# Altium PCB PCB1.PcbDoc
Units mm, origin at the board's own origin, x right, y up, seen from the top; angles counter-clockwise.
Board outline 65.15 x 49.91 mm, 2 copper layers (Top Layer, Bottom Layer); 20 components, 14 nets, 53 pads, 0 vias.
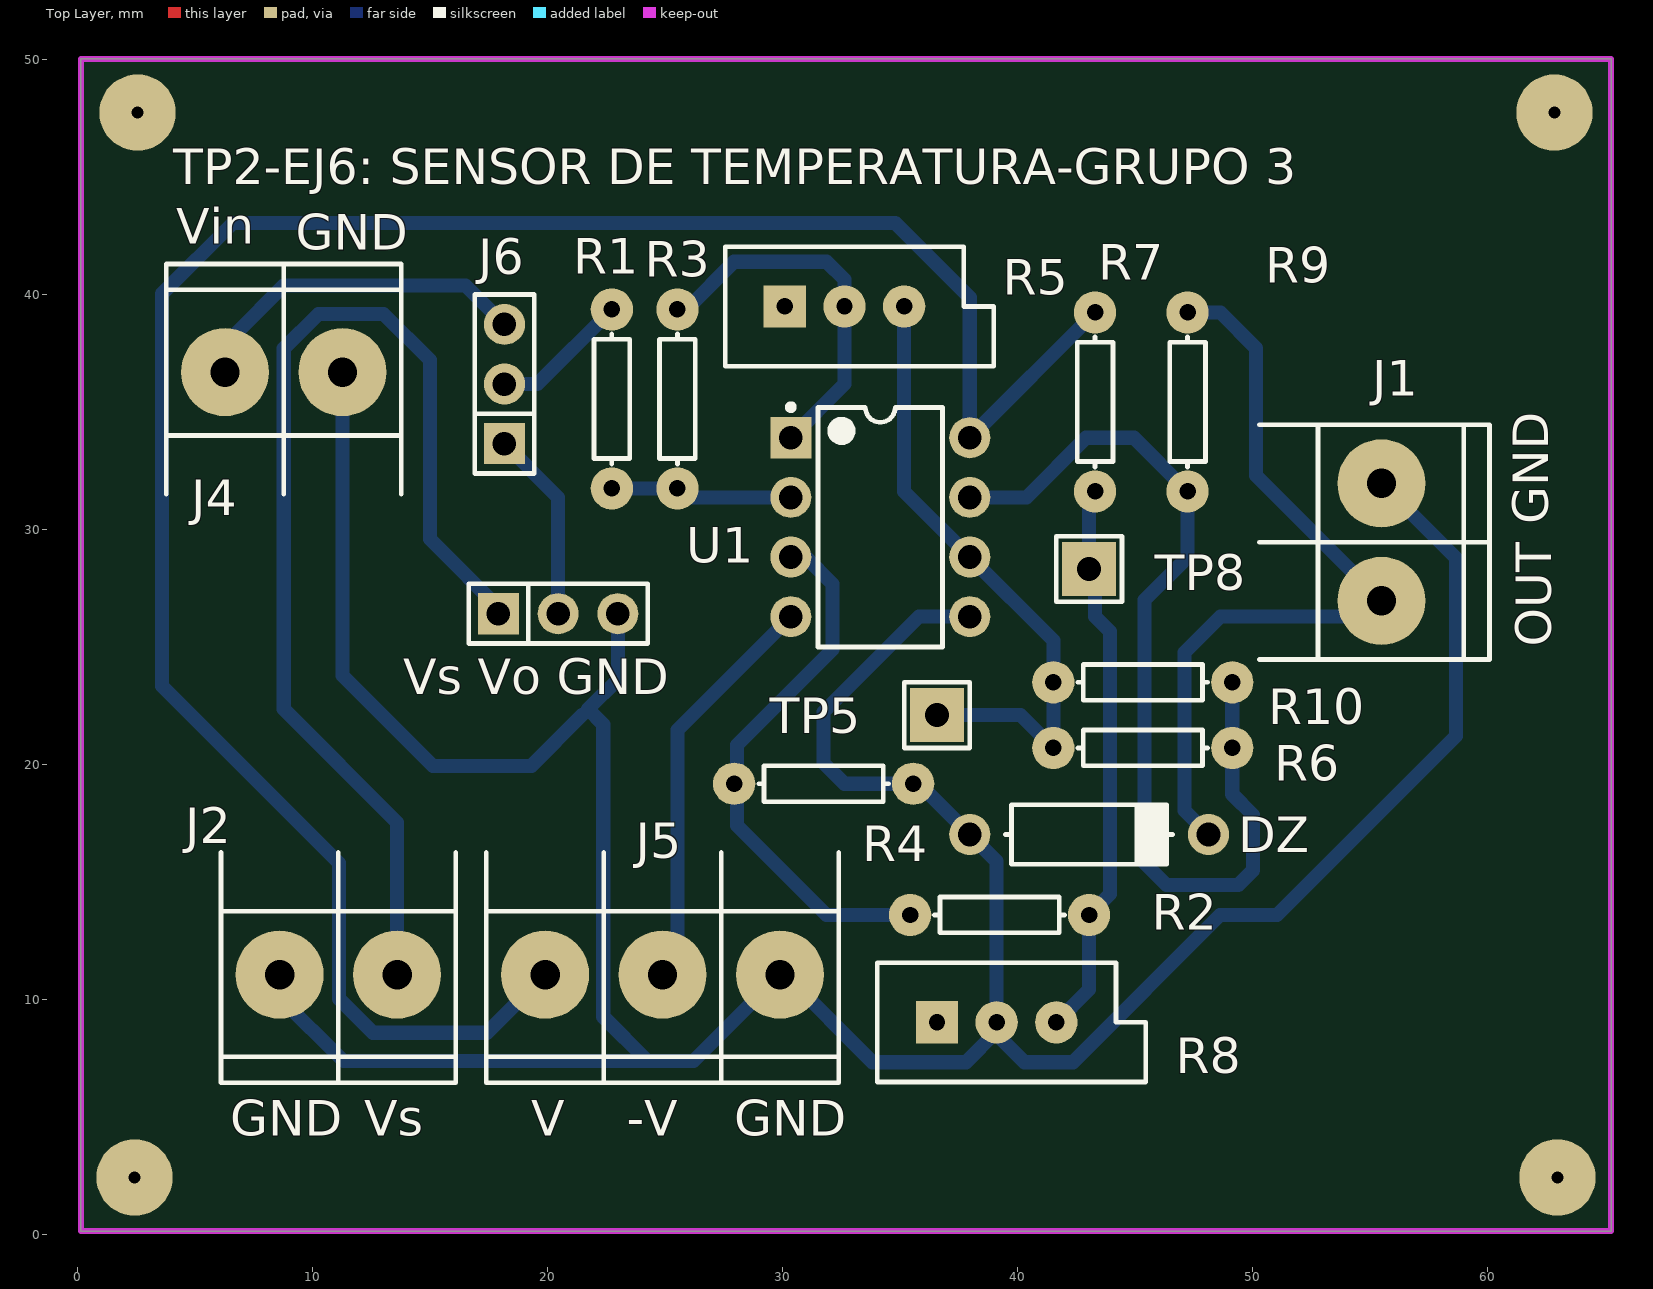
[diagram p0: Top Layer view]
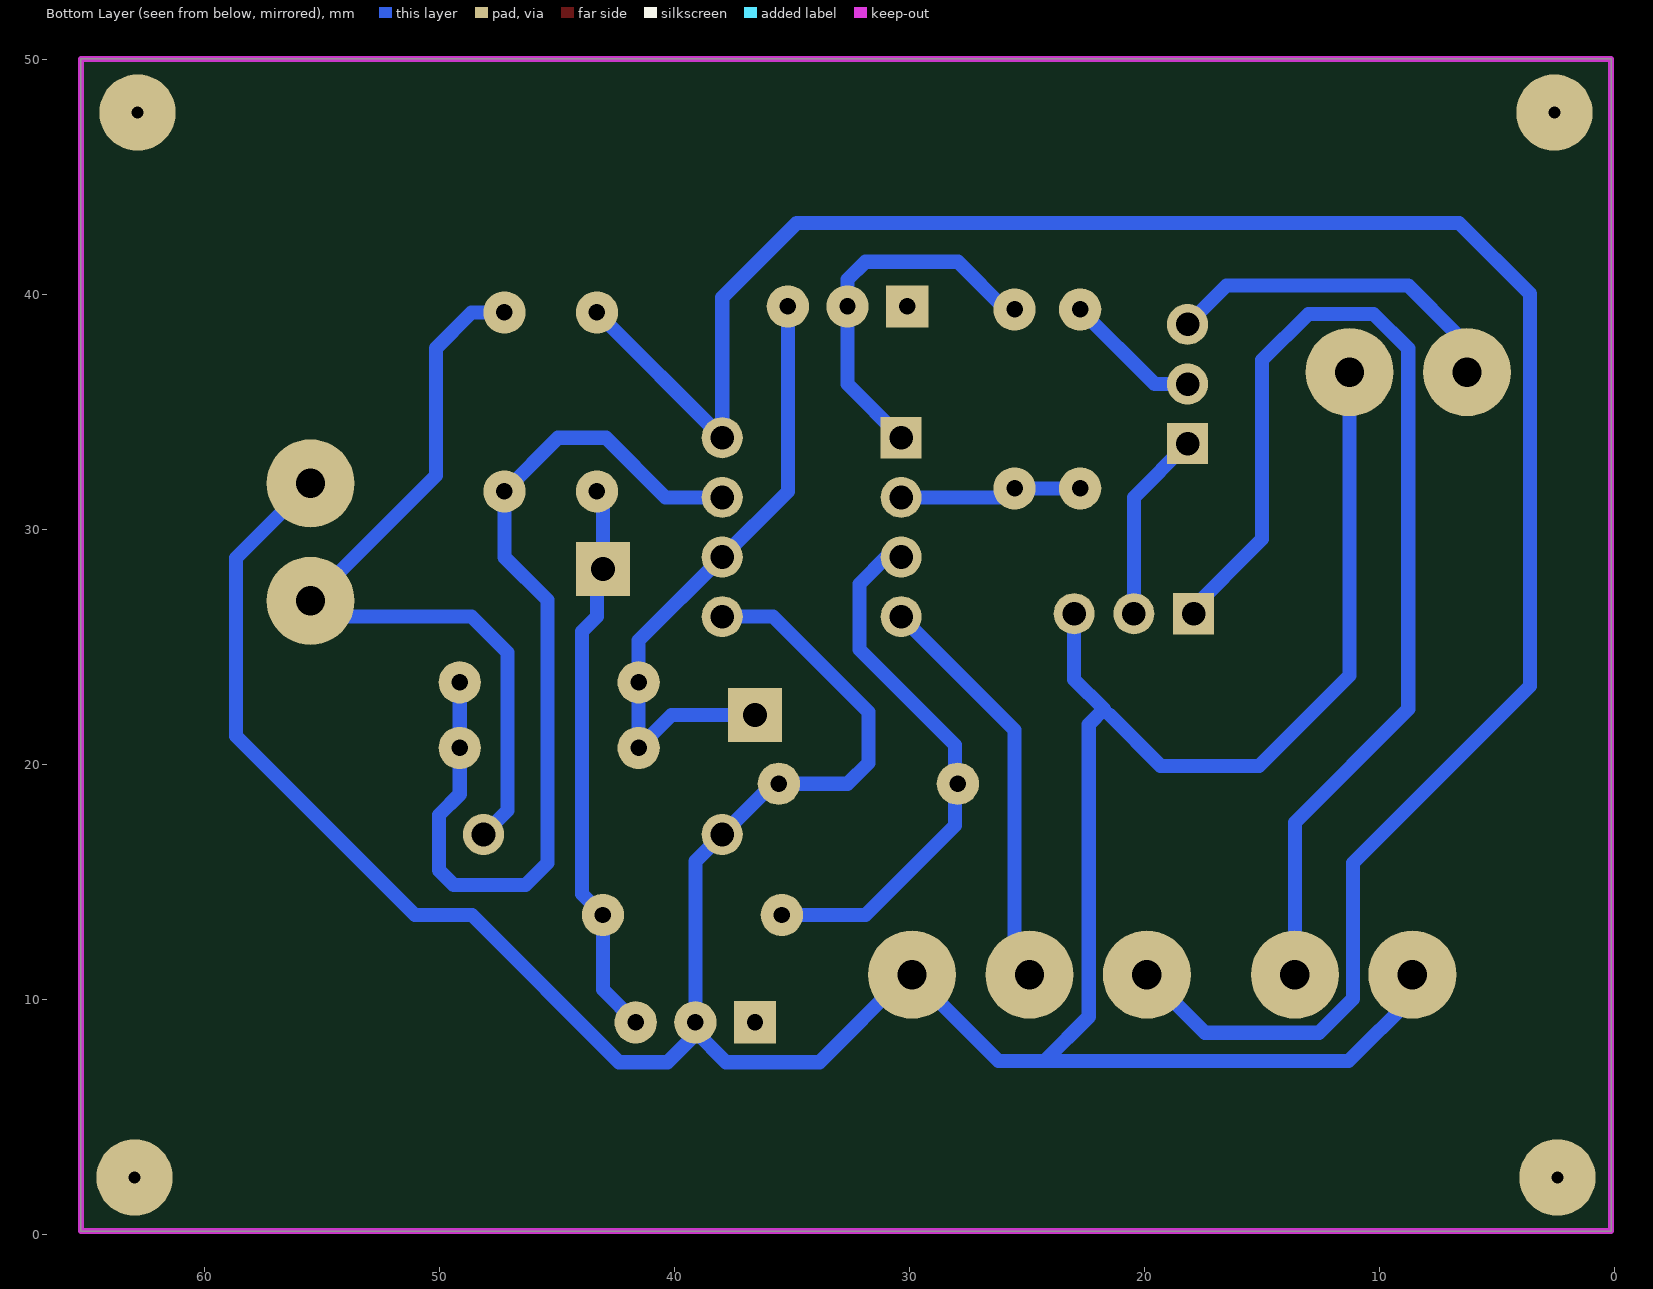
[diagram p1: Bottom Layer view, seen from below]

## Layer stack, top to bottom
Top Solder: solder mask 0.0102, Solder Resist, Dk 3.5
Top Layer: signal copper 0.0356
Dielectric 1: dielectric 0.32, FR-4, Dk 4.8
Bottom Layer: signal copper 0.0356
Bottom Solder: solder mask 0.0102, Solder Resist, Dk 3.5

## Board outline
0.127,0.127 0.127,50.038 65.278,50.038 65.278,0.127

## Design rules (kind name [scope] priority, off if disabled: settings)
Clearance [All] p1: gap=0.3 ignorepadtopadclearanceinfootprint=FALSE
PolygonConnect [All] p1: connectstyle=Relief reliefconductorwidth=0.254 reliefentries=4 polygonreliefangle="90 Angle" airgapwidth=0.254
RoutingVias [All] p1: holewidth=0.7 width=2 viastyle="Through Hole" minholewidth=0.7 minwidth=2 maxholewidth=0.7 maxwidth=2
SolderMaskExpansion [All] p1: expansion=0.102
Width [All] p1: maxlimit=0.6 minlimit=0.6 preferedwidth=0.6
30 further rules are at their usual default settings.

## Components (designator, comment, footprint, x,y, rotation, side; value= is the part's Value field where it differs from the comment)
DZ "" DO41 43.053,17.018 r0 top
J1 "" BORNERA2 55.499,29.464 r180 top
J2 "" BORNERA2 11.089,11.049 r90 top
J4 "" BORNERA2 8.763,36.703 r270 top
J5 "" BORNERA3 24.892,11.049 r90 top
J6 "JUMPER" JUMPER3 18.161,36.195 r90 top
R1 "" AXIAL-0.3 22.733,35.56 r270 top value=10K
R2 "" AXIAL-0.3 39.243,13.589 r180 top value=10K
R3 "" AXIAL-0.3 25.527,35.56 r90 top value=100K
R4 "" AXIAL-0.3 31.75,19.177 r180 top value=100K
R5 "" VR5 32.639,39.497 r0 top value=2K
R6 "" AXIAL-0.3 45.339,23.495 r180 top value=10K
R7 "" AXIAL-0.3 43.307,35.433 r90 top value=100K
R8 "" VR5 39.116,9.017 r0 top value=5K
R9 "" AXIAL-0.3 47.244,35.433 r270 top value=16K
R10 "" AXIAL-0.3 45.339,20.701 r0 top value=10K
TP5 "TP" TPTH 36.576,22.098 r0 top
TP8 "TP" TPTH 43.053,28.321 r0 top
U1 "TL072CP" TI-P8 34.163,30.099 r0 top
"Vs Vo GND" "" JUMPER3 20.447,26.416 r0 top (schematic designator VLM35)

## Footprints (in the part's own frame and the unit in brackets; to place one, negate y for a bottom-side part, rotate by r counter-clockwise, add the part's x,y. Pads: shape width x height; smd on the part's side, far side on the other; paste and mask are expansions set on the pad)
AXIAL-0.3 [mm] "Axial Device, Thru-Hole; 2 Leads; 0.3 in Pin Spacing"
  round 1.8 hole 0.7 unplated: 1(-3.81,0) 2(3.81,0)
  silkscreen extent -2.77,-0.76 2.77,0.76
BORNERA2 [mm] "Bornera con Tornillos 5mm separación"
  round 3.75 hole 1.25: 1(0,2.5) 2(0,-2.5)
  silkscreen extent -4.6,-5 5.2,5, body extent -3.76,-4.89 3.94,5.61, height 10
BORNERA3 [mm] "Bornera con Tornillos 5mm separación"
  round 3.75 hole 1.25: 1(0,5) 2(0,0) 3(0,-5)
  silkscreen extent -4.6,-7.5 5.2,7.5, body extent -3.76,-7.39 3.94,8.11, height 10.05
DO41 [mm]
  round 1.75 hole 1.016: 1(-5.08,0) 2(5.08,0)
  silkscreen extent -3.56,-1.27 3.56,1.27, body extent -5.46,-1.19 5.46,1.37, height 2.03
JUMPER3 [mm]
  rect 1.75x1.75 hole 1: 1(-2.54,0)
  round 1.75 hole 1: 2(0,0) 3(2.54,0)
  silkscreen extent -3.81,-1.27 3.81,1.27, body extent -3.81,-1.3 3.81,1.27, height 16.15
TI-P8 [mm] "DIP, 8-Leads, Body 9.59x6.35mm, Pitch 2.54mm"
  rect 1.75x1.75 hole 1.016: 1(-3.81,3.81)
  round 1.75 hole 1.016: 2(-3.81,1.27) 3(-3.81,-1.27) 4(-3.81,-3.81) 5(3.81,-3.81) 6(3.81,-1.27) 7(3.81,1.27) 8(3.81,3.81)
  silkscreen extent -3.93,-5.1 2.65,5.23, body extent -3.95,-5.07 3.95,5.07, height 5.08
TPTH [mm]
  rect 2.3x2.3 hole 1.016: 1(0,0)
  silkscreen extent -1.4,-1.4 1.4,1.4, body extent -1.27,-1.27 1.27,1.27, height 6.04
VR5 [mm] "Thru-Hole; 3 Leads"
  rect 1.8x1.8 hole 0.7 unplated: 1(-2.54,0)
  round 1.8 hole 0.7 unplated: 2(0,0) 3(2.54,0)
  silkscreen extent -5.08,-2.54 6.35,2.54

## Part data
DZ: library part "DIODO ZENER"
J1 J2 J4: library part "BORNERA 2"
J5: library part "BORNERA 3"
J6: library part JUMPER3
R1 R2 R3 R4 R6 R7 R9 R10: library part Res1, "Resistor", LatestRevisionDate=17-Jul-2002, LatestRevisionNote="Re-released for DXP Platform.", PackageDescription="Axial Device, Thru-Hole; 2 Leads; 0.3 in Pin Spacing", PackageReference=AXIAL-0.3, Published=8-Jun-2000, Publisher="Altium Limited"
R5 R8: library part RPot, "Potentiometer", LatestRevisionDate=17-Jul-2002, LatestRevisionNote="Re-released for DXP Platform.", PackageDescription="Variable Resistor, Thru-Hole; 3 Leads", PackageReference=VR5, Published=8-Jun-2000, Publisher="Altium Limited", Set Position=0.5, Sim Note="Enter the Resistance value and the set point into parameter fields."
U1: "Dual Low-Noise JFET-Input General-Purpose Operational Amplifier, 7 to 36 V, 0 to 70 degC, 8-pin DIP (P8), Pb-Free (RoHS)", Manufacturer="Texas Instruments", Rating=Catalog, Supplier Part Number 1=296-1775-5-ND, Total Supply Voltage(Max)(+5V is 5, +/-5V is 10)=36, Total Supply Voltage(Min)(+5V is 5, +/-5V is 10)=7, CMRR(Min)(dB)=70, Code_JEDEC=MS-001, ComponentLink1Description="Manufacturer URL", ComponentLink1URL=http://www.ti.com/, ComponentLink2Description=Datasheet, ComponentLink2URL=http://www.ti.com/lit/ds/symlink/tl072.pdf, ComponentLink3Description="Package Specification", ComponentLink3URL=http://www.ti.com/litv/pdf/mpdi001b, DatasheetVersion=SLOS080J, Eco-Plan="Pb-Free (RoHS)", GBW(Typ)(MHz)=3, IIB(Max)(pA)=200, Iq per channel(Max)(mA)=2.5, Mounting Technology="Through Hole", Number of Channels=2, Offset Drift(Typ)(uV/C)=18, PackageDescription="8-Pin Plastic In-Line, Body 9.59 x 6.35 mm, Pitch 2.54 mm", PackageReference=P8, PackageVersion="4040082/E, 04/2010", PartNumber=TL072CP, Slew Rate(Typ)(V/us)=13, Sub Family="General Purpose Amplifier, High Supply Voltage Amplifier (>=30V)", Supplier 1=Digi-Key, Supplier 2=Farnell, Supplier 3=Newark, Supplier 4=Mouser, Supplier Part Number 2=1106015, Supplier Part Number 3=60K6988, Supplier Part Number 4=595-TL072CP, Vio (25C)(Max)(mV)=10, Vn at 1kHz(Typ)(nV/rtHz)=18
"Vs Vo GND": library part LM35CZ, "Precision Centigrade Temperature Sensor, 3-pin TO-92", Manufacturer="National Semiconductor", PackageTopMarking=NSXYTT*LM35*CZ, PowerWise=N, Supplier Part Number 1=9488197, Code_JEDEC=TO-226-AA, ComponentLink1Description="LM35 Datasheet", ComponentLink1URL=http://www.national.com/ds/LM/LM35.pdf, ComponentLink2Description="LM35 Web Page", ComponentLink2URL=http://www.national.com/pf/LM/LM35.html, ComponentLink3Description="Z03A Package Page", ComponentLink3URL=http://www.national.com/packaging/folders/z03a.html, CompType="Temp Sensor IC", DatasheetVersion=Nov-2000, LatestRevisionDate=15-Jul-2009, LatestRevisionNote="Sch pins 1 & 3 reversed.", PackageDescription="TO-92, Molded, 3 Lead", PackageReference=Z03A, PackageVersion="revG, Sep-2000", PartNumber=LM35CZ, PinCount=3, Published=4-Dec-2008, Publisher="Altium Limited", RoHS=N, Supplier 1=Farnell

## Free pads (board coordinates)
  round 3.25 hole 0.5: 2(2.54,47.752) 3(62.865,47.752) 4(2.413,2.413) 5(62.992,2.413)

## Nets (pads, with @x,y where several pads share a name; then routed paths per layer and width w, separated by ;. In a path a pad name is that pad's centre, name@x,y a point inside that pad or via, vN(x,y) a via of type N, cw(c..) or ccw(c..) an arc to the next point about the centre after c; other vN are vias at no path point)
-VCC: J5.2 U1.4 | length 17.5
  Bottom Layer w0.6: J5.2 25.527,11.684 25.527,21.463 U1.4
GND: "Vs Vo GND.3" DZ.1 J1.2 J2.1 J4.1 J5.3 R4.1 R8.2 U1.5 | length 147.7
  Bottom Layer w0.6: J2.1 8.589,10.08 11.303,7.366 24.257,7.366 ; J4.1@12.065,36.703 J4.1 11.263,23.789 15.113,19.939 19.304,19.939 21.463,22.098 ; 22.987,26.416 22.987,23.622 21.717,22.352 22.367,21.702 22.367,9.256 24.257,7.366 ; U1.5 35.814,26.289 31.75,22.225 31.75,20.066 32.639,19.177 R4.1 35.814,19.177 DZ.1 39.116,15.875 R8.2 R8.2@39.116,8.626 ; J1.2 58.674,28.789 58.674,21.209 51.054,13.589 48.632,13.589 42.36,7.317 40.308,7.317 39.116,8.509 R8.2@39.116,8.626 ; 24.257,7.366 26.209,7.366 J5.3 30.099,11.049 33.831,7.317 37.807,7.317 R8.2@39.116,8.626
NetDZ_2: DZ.2 J1.1 R9.1 | length 34
  Bottom Layer w0.6: R9.1 48.641,39.243 50.165,37.719 50.165,32.298 J1.1 54.824,26.289 48.641,26.289 47.117,24.765 47.117,18.034 DZ.2
NetJ4_2: J4.2 J6.3 | length 15.5
  Bottom Layer w0.6: J4.2 J4.2@6.684,37.124 ; J4.2@6.684,36.449 J4.2@6.684,37.124 ; J6.3 16.51,40.386 8.763,40.386 6.684,38.307 J4.2@6.684,37.124
NetJ6_2: J6.2 R1.1 | length 5.9
  Bottom Layer w0.6: J6.2 19.558,36.195 R1.1
NetR1_2: R1.2 R3.1 U1.2 | length 8
  Bottom Layer w0.6: R1.2 R3.1@25.4,31.75 ; R3.1@25.527,31.877 R3.1@25.4,31.75 ; U1.2 25.908,31.369 R3.1 R3.1@25.4,31.75
NetR2_1: R2.1 R7.1 R8.3 TP8.1 | length 24
  Bottom Layer w0.6: R8.3 43.053,10.414 R2.1 43.942,14.478 43.942,25.654 43.307,26.289 43.307,28.067 TP8.1 43.053,31.369 R7.1
NetR2_2: R2.2 R4.2 U1.3 | length 23.2
  Bottom Layer w0.6: U1.3 30.988,28.829 32.131,27.686 32.131,24.892 28.067,20.828 28.067,17.399 31.877,13.589 R2.2
NetR3_2: R3.2 R5.2 U1.1 | length 16.1
  Bottom Layer w0.6: R3.2@25.654,39.497 R3.2 25.908,39.37 27.94,41.402 31.877,41.402 32.639,40.64 R5.2 32.639,36.195 U1.1
NetR5_3: R5.3 R6.2 R10.1 TP5.1 U1.6 | length 27
  Bottom Layer w0.6: R5.3 35.179,31.623 U1.6 41.529,25.273 R6.2 R10.1 40.132,22.098 TP5.1
NetR6_1: R6.1 R9.2 R10.2 U1.7 | length 41.5
  Bottom Layer w0.6: U1.7 40.386,31.369 42.926,33.909 44.958,33.909 R9.2 47.244,28.82 45.417,26.993 45.417,15.797 46.355,14.859 49.403,14.859 50.038,15.494 50.038,17.839 49.149,18.728 R10.2 R6.1
VCC: J5.1 R7.2 U1.8 | length 94
  Bottom Layer w0.6: J5.1 17.417,8.574 12.564,8.574 11.114,10.024 11.114,15.81 3.588,23.336 3.588,40.037 6.604,43.053 34.798,43.053 37.973,39.878 U1.8 R7.2
VLM35: "Vs Vo GND.2" J6.1 | length 8.7
  Bottom Layer w0.6: J6.1@18.161,33.147 J6.1 20.447,31.369 20.447,26.416
Vs: "Vs Vo GND.1" J2.2 | length 48.4
  Bottom Layer w0.6: J2.2 13.589,17.526 8.763,22.352 8.763,37.703 10.238,39.178 13.019,39.178 14.986,37.211 14.986,29.591 18.161,26.416
pads on no net: R5.1 R8.1

## Keep-outs
Keep-Out Layer:
  the board outline again, w0.254

## Silkscreen, mask and mechanical layers (free items; w line width, h text height)
Top Overlay:
  text "TP2-EJ6: SENSOR DE TEMPERATURA-GRUPO 3" at 4.064,44.704 h1.52
  text "Vin" at 4.191,42.164 h1.52
  text "GND" at 9.271,41.91 h1.52
  text "GND" at 62.611,30.226 h1.52 r90
  text "OUT" at 62.738,25.019 h1.52 r90
  text "GND" at 6.477,4.191 h1.52
  text "Vs" at 12.192,4.191 h1.52
  text "V" at 19.304,4.191 h1.52
  text "-V" at 23.368,4.191 h1.52
  text "GND" at 27.94,4.191 h1.52